# EAGLE board test51 (EAGLE 8.6.3)
REV: B
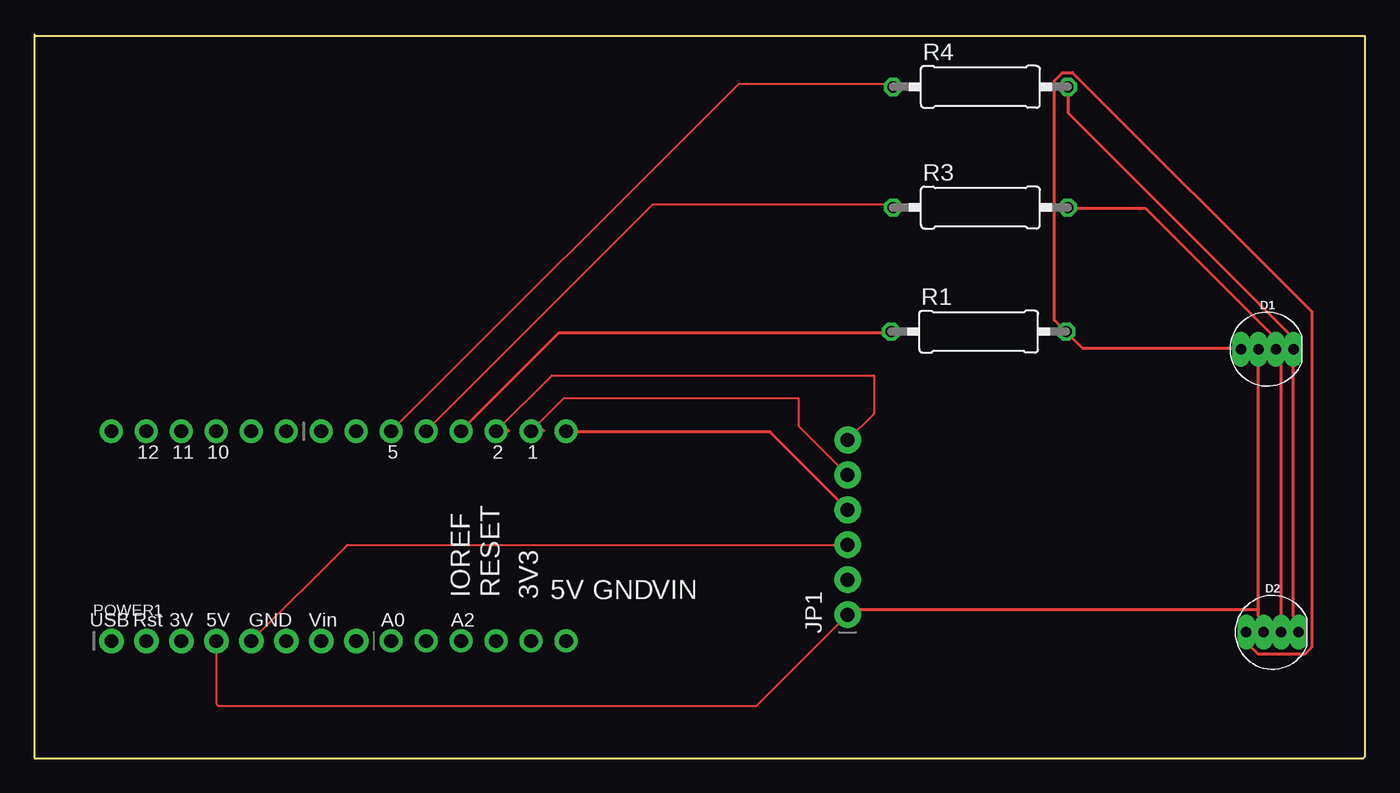
[diagram p0: board, top side]
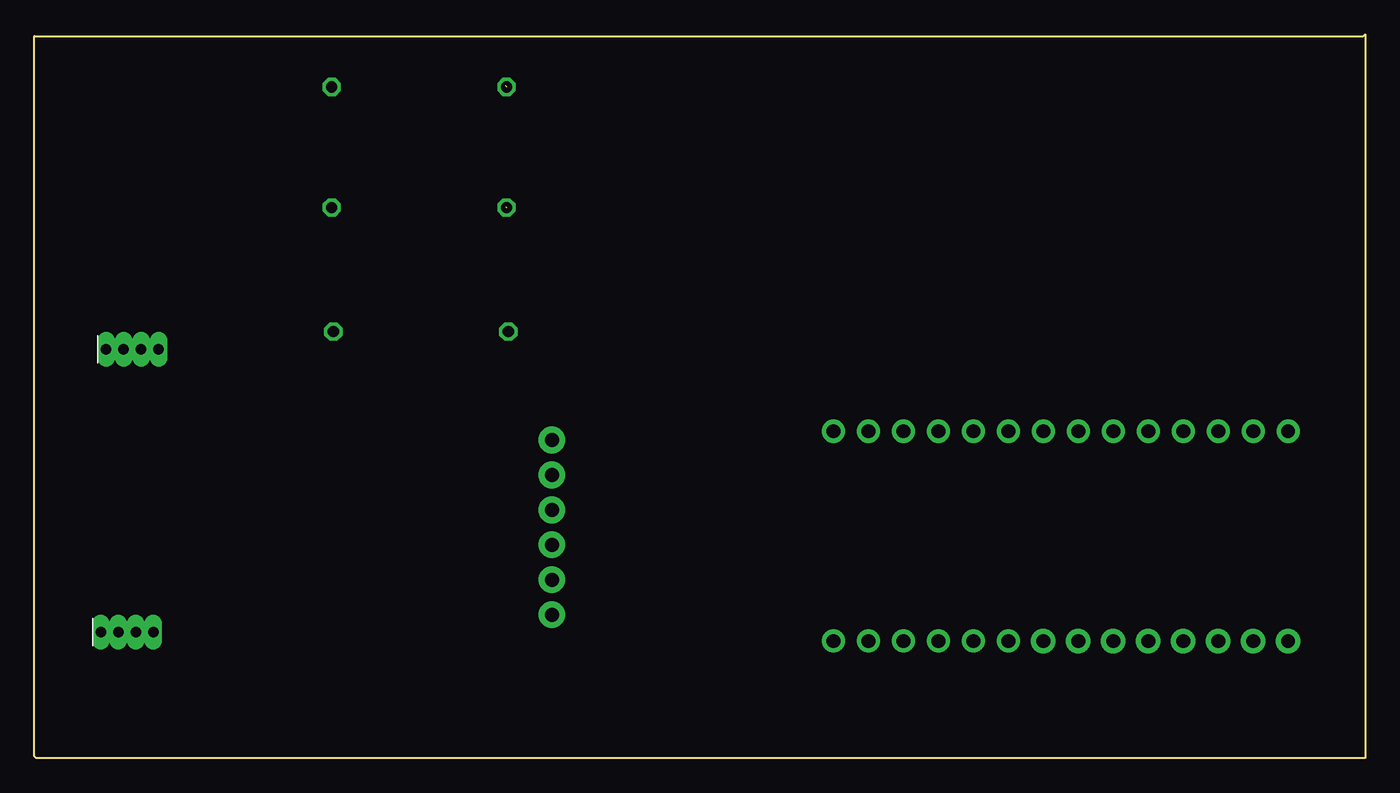
[diagram p1: board, bottom side, seen from below]

Size 96.65 x 52.58 mm. Coordinates in mm from the lower left corner, seen from the top.
Outline: 0,52.58 0,0 96.52,0 96.65,0.13 96.65,52.45 0.13,52.45 0,52.58
Copper layers (1*16): Top 0.035mm / dielectric 1.5mm / Bottom 0.035mm
Design rules "adafruit *": minimum track width 8mil, minimum drill 15.5mil, track to track 8mil, track to pad 8mil, pad to pad 8mil, via to via 8mil, smd to smd 8mil, copper to edge 10mil, drill to drill 8mil, minimum pad ring 10mil, minimum via ring 8mil, stop-mask expansion 2mil, vias tented up to drill 20mil, thermal gap 10mil
Net classes: 1 power: width 0.305 mm, drill 0.483 mm, clearance 0.203 mm; 2 gnd: width 0.305 mm, drill 0.483 mm, clearance 0.203 mm; 3 usbvcc: width 0.305 mm, drill 0.483 mm, clearance 0.203 mm; 4 aref: width 0.254 mm, drill 0.483 mm, clearance 0.203 mm

## Footprints (pad centres in the part's own frame; a part is rotated, then mirrored left to right if it is on the bottom)
1X06_ROUND = drill 1 pad 1.676: 1 -6.35,0; 2 -3.81,0; 3 -1.27,0; 4 1.27,0; 5 3.81,0; 6 6.35,0
LED-RGB-THRU = drill 0.762 pad 0.889 long: 1 1.905,0; 2 0.635,0; 3 -0.635,0; 4 -1.905,0
1X08_ROUND = drill 1 pad 1.676: 1 -8.89,0; 2 -6.35,0; 3 -3.81,0; 4 -1.27,0; 5 1.27,0; 6 3.81,0; 7 6.35,0; 8 8.89,0
1X06_ROUND_76 = drill 1 pad 1.93: 1 -6.35,0; 2 -3.81,0; 3 -1.27,0; 4 1.27,0; 5 3.81,0; 6 6.35,0
1X08_ROUND_70 = drill 1 pad 1.778: 1 -8.89,0; 2 -6.35,0; 3 -3.81,0; 4 -1.27,0; 5 1.27,0; 6 3.81,0; 7 6.35,0; 8 8.89,0
0309/12 = drill 0.813 octagon: 1 -6.35,0; 2 6.35,0

## Placement (x,y rotation side)
AD  20609  [1X06_ROUND]  32.26,8.51 0 top
AD1  20609  [1X06_ROUND]  11.94,23.75 180 top
D1  CLEAR  [LED-RGB-THRU]  89.53,29.72 0 top
D2  CLEAR  [LED-RGB-THRU]  89.92,9.14 0 top
IOL  20610  [1X08_ROUND]  29.72,23.75 0 top
JP1  Breakout  [1X06_ROUND_76]  59.05,16.76 90 top
POWER1  20610  [1X08_ROUND_70]  14.48,8.51 0 top
R1  [0309/12]  68.58,30.99 0 top
R3  [0309/12]  68.71,40 0 top
R4  [0309/12]  68.71,48.77 0 top

## Library data of the parts
AD AD1 IOL JP1 POWER1 = microbuilder
D1 D2 = SparkFun-LED; PROD_ID: DIO-08418
R1 R3 R4 = resistor

## Nets
+3V3: JP1.2
IO2: IOL.6 JP1.6
N$10: IOL.5 R1.1
S$1: D1.3 D2.3 JP1.1 POWER1.4
S$3: IOL.7 JP1.5
S$5 [gnd]: JP1.3 POWER1.5
S$6: IOL.8 JP1.4
S$8: IOL.4 R3.1
S$9: IOL.3 R4.1
S$10: D1.1 D2.1 R4.2
S$11: D1.2 D2.2 R3.2
S$12: D1.4 D2.4 R1.2

## Tracks (layer width: path | path; a pad name or v marks a point on that pad's centre or on a via)
IO2
  Top 0.152: IOL.6 37.59,27.81 60.96,27.81 60.96,25.02 JP1.6
  Top 0.203: 34.44,23.8 33.53,23.8 IOL.6 | 59.03,23.19 JP1.6
IO4
  Top 0.152: 62.1,39.88 62.23,39.75
IO5
  Top 0.152: 62.23,48.64 62.36,48.51
N$10
  Top 0.203: R1.1 62.18,30.91 38.1,30.91 30.99,23.8 IOL.5
  Bottom 0.254: 31.11,23.75 IOL.5
S$1
  Top 0.152: POWER1.4 13.21,3.94 13.34,3.81 52.45,3.81 59.12,10.48
  Top 0.203: 13.21,8.46 POWER1.4 | 88.9,10.79 88.9,10.29 89.2,9.98 89.2,9.17 D2.3 | 88.9,10.79 D1.3 | 88.9,10.79 59.44,10.79 59.12,10.48 JP1.1
S$3
  Top 0.152: IOL.7 38.48,26.16 55.5,26.16 55.5,24.13 JP1.5
  Top 0.203: 36.98,23.8 36.07,23.8 IOL.7 | 59.03,20.65 JP1.5
S$5
  Top 0.152: POWER1.5 22.73,15.49 JP1.3
  Top 0.305: 15.75,8.56 POWER1.5 | 59.03,15.47 JP1.3
S$6
  Top 0.203: IOL.8 38.61,23.7 53.44,23.7 59.03,18.11 JP1.4
S$8  (1 unrouted)
  Top 0.152: 62.42,40.07 62.25,40.23 44.93,40.23 IOL.4
S$9  (1 unrouted)
  Top 0.152: 62.48,48.89 62.38,49 51.16,49 IOL.3
S$10
  Top 0.203: D2.1 91.74,9.17 91.74,9.98 91.44,10.29 D1.1 91.44,30.5 75.08,46.86 75.08,48.69 R4.2
S$11
  Top 0.203: R3.2 75.08,39.95 80.67,39.95 90.12,30.5 90.12,29.79 D1.2 90.22,29.69 90.22,28.88 90.53,28.57 90.53,9.17 D2.2
S$12
  Top 0.203: D1.4 87.58,29.79 76.1,29.79 74.98,30.91 R1.2 74.88,31.01 74.07,31.83 74.07,49.2 74.68,49.81 75.39,49.81 92.76,32.44 92.76,8.05 92.25,7.54 88.9,7.54 88.09,8.36 88.09,9.07 D2.4

## Text on the board
tPlace: 12 | 11 | 10 | 5 | 2 | 1 | USB | Rst | 3V | 5V | GND | Vin | A0 | A2
tNames: IOREF | RESET | 3V3 | 5V | GND | VIN
214bmp: D:/SmartProjects/Snc/a4_bn_logo2.bmp